# EAGLE board PotiBoard (EAGLE 7.0.0)
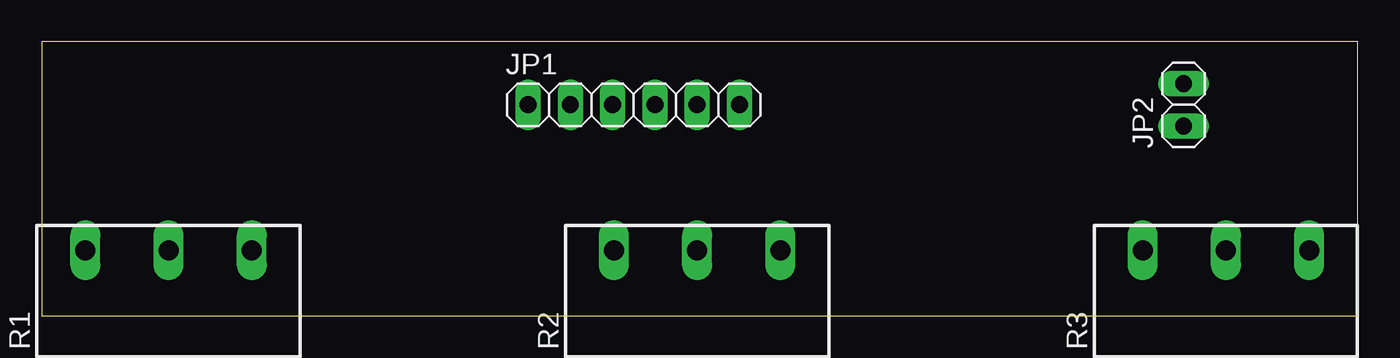
[diagram p0: board, top side]
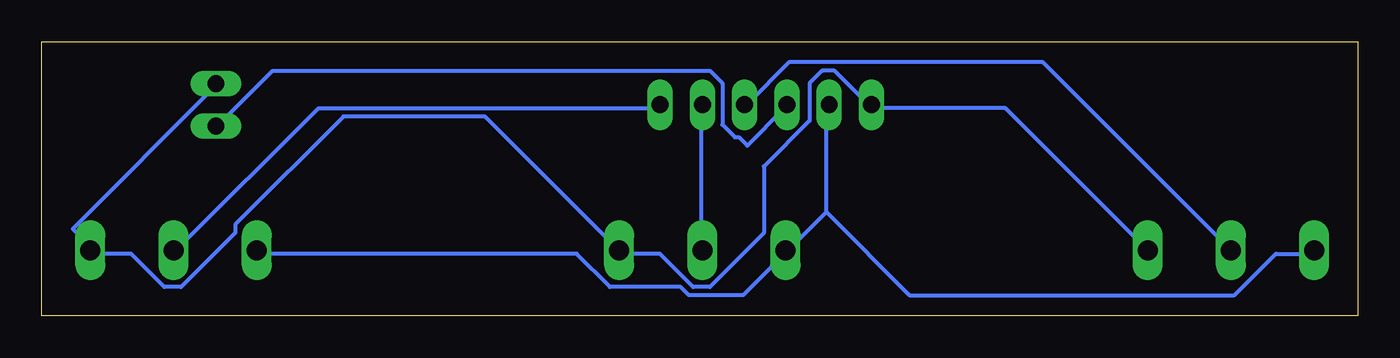
[diagram p1: board, bottom side, seen from below]

Size 79.05 x 16.5 mm. Coordinates in mm from the lower left corner, seen from the top.
Outline: 0,0 79.05,0 79.05,16.5 0,16.5 0,0
Copper layers (1*16): Top 0.035mm / dielectric 1.5mm / Bottom 0.035mm
Design rules "default": minimum track width 10mil, minimum drill 24mil, track to track 8mil, track to pad 8mil, pad to pad 8mil, via to via 8mil, smd to smd 8mil, copper to edge 40mil, drill to drill 8mil, minimum pad ring 10mil, minimum via ring 8mil, stop-mask expansion 4mil, vias tented up to drill 0mil, thermal gap 10mil

## Footprints (pad centres in the part's own frame; a part is rotated, then mirrored left to right if it is on the bottom)
1X06 = drill 1.016 long: 1 -6.35,0; 2 -3.81,0; 3 -1.27,0; 4 1.27,0; 5 3.81,0; 6 6.35,0
1X02 = drill 1.016 long: 1 -1.27,0; 2 1.27,0
PC16S = drill 1.2 long: 1A -5,6.5; 1E 5,6.5; 1S 0,6.5

## Placement (x,y rotation side)
JP1  [1X06]  35.56,12.7 0 top
JP2  [1X02]  68.58,12.7 90 top
R1  PC16S  [PC16S]  7.62,-2.54 0 top
R2  PC16S  [PC16S]  39.37,-2.54 0 top
R3  PC16S  [PC16S]  71.12,-2.54 0 top

## Library data of the parts
JP1 JP2 = pinhead
R1-R3 = piher; OC_FARNELL: 4452940; OC_NEWARK: unknown

## Nets
N$1: JP1.2 R1.1A R2.1A R3.1A
N$2: JP1.1 JP2.2 R1.1E R2.1E R3.1E
N$3: JP1.4 R1.1S
N$4: JP1.5 R2.1S
N$5: JP1.6 R3.1S
N$6: JP1.3 JP2.1

## Tracks (layer width: path | path; a pad name or v marks a point on that pad's centre or on a via)
N$1
  Bottom 0.254: 31.92,6.25 31.92,12.5 JP1.2 | 31.92,6.25 34.17,4 R2.1A 34.42,3.75 36.92,1.25 40.17,1.25 40.67,1.75 44.92,1.75 46.92,3.75 65.92,3.75 R3.1A | 31.92,6.25 26.92,1.25 7.42,1.25 4.92,3.75 2.67,3.75 R1.1A
N$2
  Bottom 0.254: JP2.2 68.67,13.75 77.17,5.25 75.92,4 R3.1E 75.92,3.75 73.67,3.75 71.67,1.75 70.67,1.75 67.42,5 67.42,5.5 60.92,12 52.42,12 44.42,4 R2.1E 44.17,3.75 41.92,3.75 39.92,1.75 38.92,1.75 35.67,5 35.67,9 32.92,11.75 32.92,14 32.17,14.75 31.42,14.75 29.42,12.75 JP1.1 29.17,12.5 21.17,12.5 12.67,4 R1.1E
N$3
  Bottom 0.254: JP1.4 36.67,12.75 34.17,15.25 18.92,15.25 7.67,4 R1.1S
N$4
  Bottom 0.254: JP1.5 39.42,12.5 39.42,4 R2.1S
N$5
  Bottom 0.254: JP1.6 41.92,12.5 62.42,12.5 70.92,4 R3.1S
N$6
  Bottom 0.254: JP1.3 34.42,12.5 36.67,10.25 37.17,10.75 37.42,10.75 38.17,11.5 38.17,14 38.92,14.75 65.17,14.75 68.42,11.5 JP2.1